# EAGLE board spion_3d (EAGLE 6.5.0)
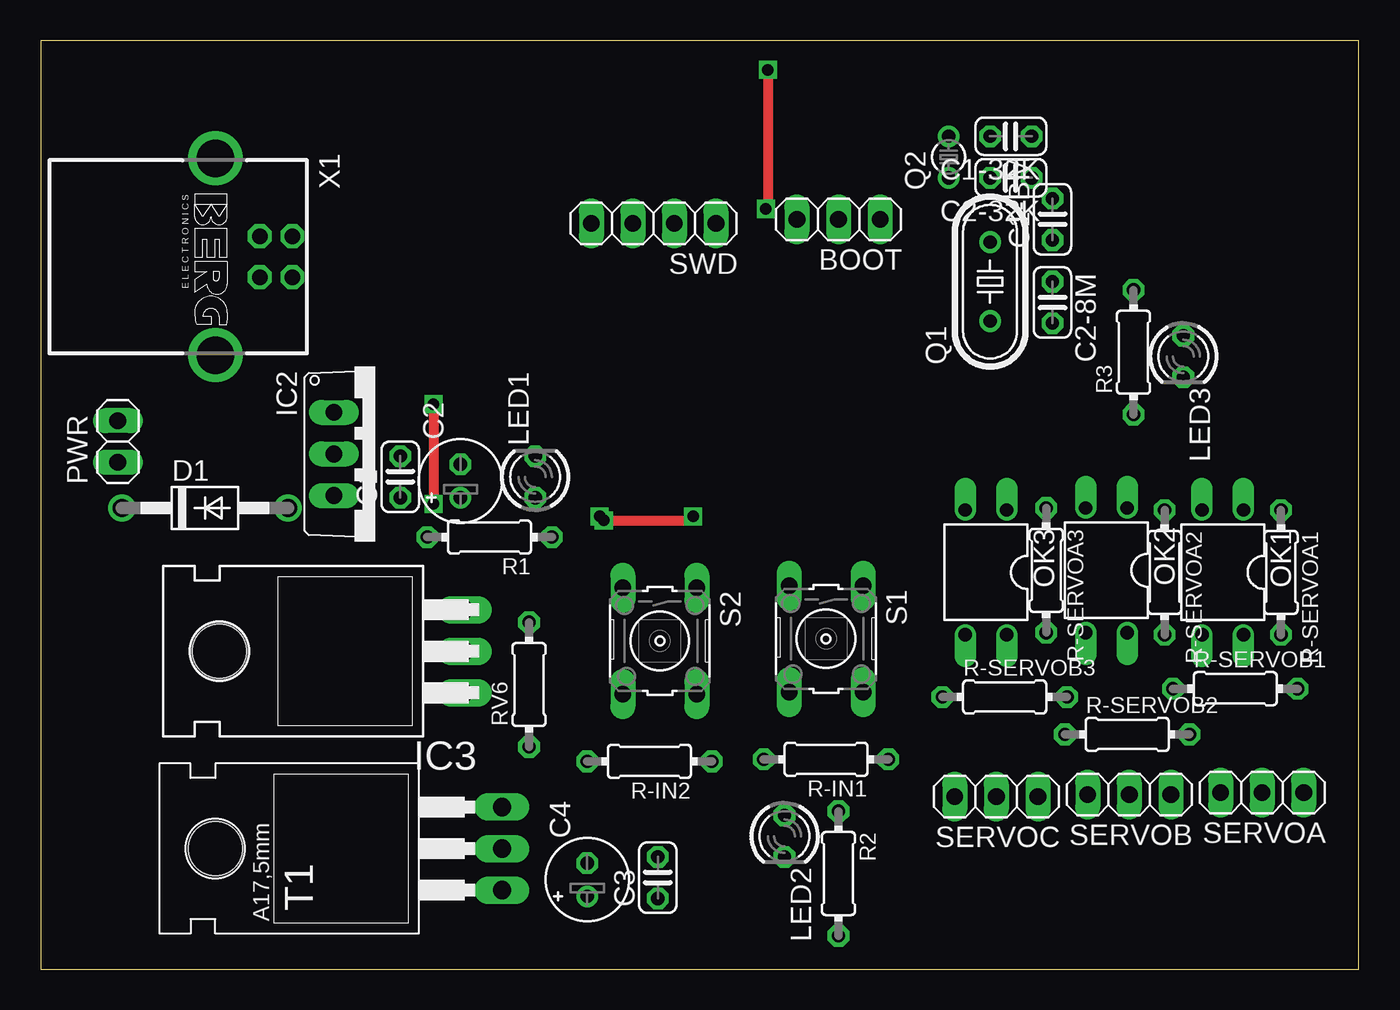
[diagram p0: board, top side]
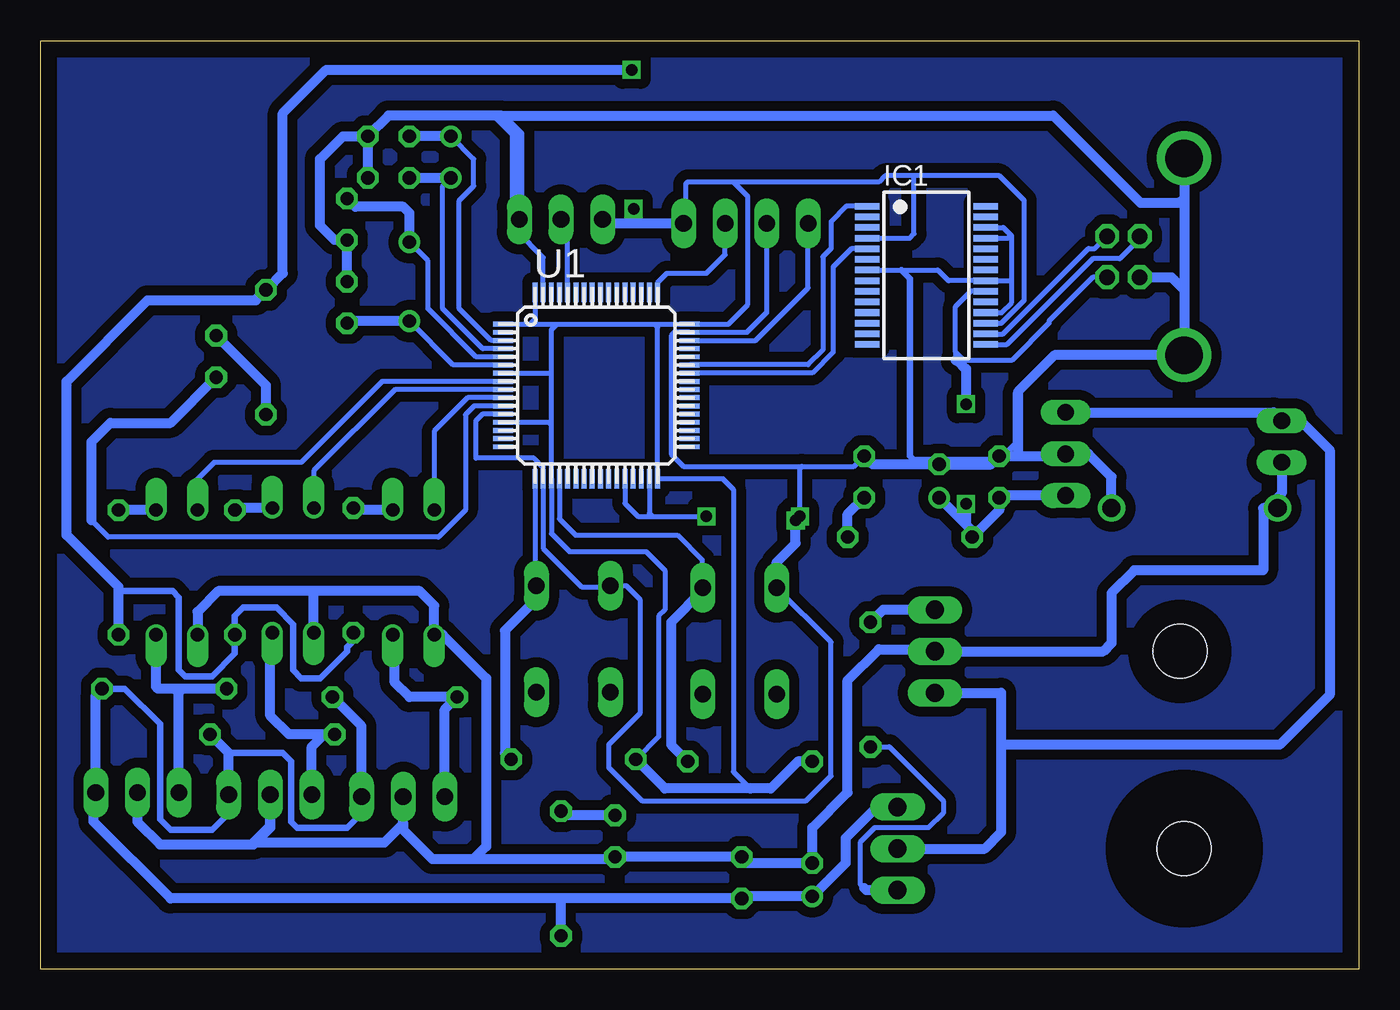
[diagram p1: board, bottom side, seen from below]

Size 80.57 x 56.76 mm. Coordinates in mm from the lower left corner, seen from the top.
Outline: 0,0 80.57,0 80.57,56.76 0,56.76 0,0
Copper layers (1*16): Top 0.035mm / dielectric 1.5mm / Bottom 0.035mm
Design rules "default": minimum track width 10mil, minimum drill 24mil, track to track 8mil, track to pad 8mil, pad to pad 8mil, via to via 8mil, smd to smd 8mil, copper to edge 40mil, drill to drill 8mil, minimum pad ring 10mil, minimum via ring 8mil, stop-mask expansion 4mil, vias tented up to drill 0mil, thermal gap 10mil

## Footprints (pad centres in the part's own frame; a part is rotated, then mirrored left to right if it is on the bottom)
1X03 = drill 1.016 long: 1 -2.54,0; 2 0,0; 3 2.54,0
C025-024X044 = drill 0.813 octagon: 1 -1.27,0; 2 1.27,0
E2-5 = drill 0.813 pad 1.27: + -1.016,0 | drill 0.813 pad 1.27 octagon: - 1.016,0
DO41-10 = drill 1.118: A 5.08,0; C -5.08,0
SSOP28 = smd 0.4 x 1.5: 1 -4.225,-3.625; 2 -3.575,-3.625; 3 -2.925,-3.625; 4 -2.275,-3.625; 5 -1.625,-3.625; 6 -0.975,-3.625; 7 -0.325,-3.625; 8 0.325,-3.625; 9 0.975,-3.625; 10 1.625,-3.625; 11 2.275,-3.625; 12 2.925,-3.625; 13 3.575,-3.625; 14 4.225,-3.625; 15 4.225,3.625; 16 3.575,3.625; 17 2.925,3.625; 18 2.275,3.625; 19 1.625,3.625; 20 0.975,3.625; 21 0.325,3.625; 22 -0.325,3.625; 23 -0.975,3.625; 24 -1.625,3.625; 25 -2.275,3.625; 26 -2.925,3.625; 27 -3.575,3.625; 28 -4.225,3.625
TO220V = drill 1.016 long: 1 -2.54,-2.54; 2 0,-2.54; 3 2.54,-2.54
TO220H = drill 1.118 long: 1 -2.54,-10.16; 2 0,-10.16; 3 2.54,-10.16 | hole 3.302: 0,4.826
LED3MM = drill 0.813 octagon: A -1.27,0; K 1.27,0
DIL04 = drill 0.813 offset: 1 -1.27,-3.81; 2 1.27,-3.81; 3 1.27,3.81; 4 -1.27,3.81
1X02 = drill 1.016 long: 1 -1.27,0; 2 1.27,0
HC49/S = drill 0.813: 1 -2.413,0; 2 2.413,0
TC26V = drill 0.813: 1 -1.27,0; 2 1.27,0
0204/7 = drill 0.813 octagon: 1 -3.81,0; 2 3.81,0
B3F-10XX = drill 1.016 long: 1 -3.251,2.261; 2 3.251,2.261; 3 -3.251,-2.261; 4 3.251,-2.261
1X04 = drill 1.016 long: 1 -3.81,0; 2 -1.27,0; 3 1.27,0; 4 3.81,0
TO220 = drill 1.118 long: 1 -2.54,-6.35; 2 0,-6.35; 3 2.54,-6.35 | hole 3.302: 0,11.176
TQFP64 = smd 1.2 x 0.3: 1 -5.7,3.75; 2 -5.7,3.25; 3 -5.7,2.75; 4 -5.7,2.25; 5 -5.7,1.75; 6 -5.7,1.25; 7 -5.7,0.75; 8 -5.7,0.25; 9 -5.7,-0.25; 10 -5.7,-0.75; 11 -5.7,-1.25; 12 -5.7,-1.75; 13 -5.7,-2.25; 14 -5.7,-2.75; 15 -5.7,-3.25; 16 -5.7,-3.75; 33 5.7,-3.75; 34 5.7,-3.25; 35 5.7,-2.75; 36 5.7,-2.25; 37 5.7,-1.75; 38 5.7,-1.25; 39 5.7,-0.75; 40 5.7,-0.25; 41 5.7,0.25; 42 5.7,0.75; 43 5.7,1.25; 44 5.7,1.75; 45 5.7,2.25; 46 5.7,2.75; 47 5.7,3.25; 48 5.7,3.75 | smd 0.3 x 1.2: 17 -3.75,-5.7; 18 -3.25,-5.7; 19 -2.75,-5.7; 20 -2.25,-5.7; 21 -1.75,-5.7; 22 -1.25,-5.7; 23 -0.75,-5.7; 24 -0.25,-5.7; 25 0.25,-5.7; 26 0.75,-5.7; 27 1.25,-5.7; 28 1.75,-5.7; 29 2.25,-5.7; 30 2.75,-5.7; 31 3.25,-5.7; 32 3.75,-5.7; 49 3.75,5.7; 50 3.25,5.7; 51 2.75,5.7; 52 2.25,5.7; 53 1.75,5.7; 54 1.25,5.7; 55 0.75,5.7; 56 0.25,5.7; 57 -0.25,5.7; 58 -0.75,5.7; 59 -1.25,5.7; 60 -1.75,5.7; 61 -2.25,5.7; 62 -2.75,5.7; 63 -3.25,5.7; 64 -3.75,5.7
PN61729-S = drill 0.95 octagon: 1 1.25,4.71; 2 -1.25,4.71; 3 -1.25,2.71; 4 1.25,2.71 | drill 2.3 pad 2.9: S1 -6.02,0; S2 6.02,0

## Placement (x,y rotation side)
BOOT  [1X03]  48.77,45.85 180 top
C1  [C025-024X044]  21.97,30.1 90 top
C1-32K  [C025-024X044]  59.31,50.93 180 top
C1-BM  [C025-024X044]  61.85,45.85 90 top
C2  [E2-5]  25.65,29.84 90 top
C2-8M  [C025-024X044]  61.85,40.77 270 top
C2-32K  [C025-024X044]  59.31,48.39 180 top
C3  [C025-024X044]  37.72,5.59 90 top
C4  [E2-5]  33.4,5.46 90 top
D1  1N4004  [DO41-10]  10.03,28.19 0 top
IC1  FT232RL  [SSOP28]  26.42,42.42 270 bottom
IC2  7805TV  [TO220V]  20.45,31.5 270 top
IC3  7806T  [TO220H]  15.75,19.43 90 top
LED1  [LED3MM]  30.23,30.1 90 top
LED2  [LED3MM]  45.47,8.13 270 top
LED3  [LED3MM]  69.85,37.47 270 top
OK1  PC817  [DIL04]  72.26,24.26 180 top
OK2  PC817  [DIL04]  65.15,24.38 180 top
OK3  PC817  [DIL04]  57.78,24.26 180 top
PWR  [1X02]  4.7,32.26 90 top
Q1  [HC49/S]  58.04,42.04 90 top
Q2  [TC26V]  55.5,49.66 90 top
R1  330  [0204/7]  27.43,26.42 180 top
R2  330  [0204/7]  48.77,5.84 270 top
R3  330  [0204/7]  66.8,37.72 90 top
R-IN1  4k7  [0204/7]  48.01,12.83 180 top
R-IN2  4k7  [0204/7]  37.21,12.7 180 top
R-SERVOA1  330  [0204/7]  75.82,24.26 270 top
R-SERVOA2  330  [0204/7]  68.71,24.26 270 top
R-SERVOA3  330  [0204/7]  61.47,24.38 270 top
R-SERVOB1  4k7  [0204/7]  73.03,17.14 0 top
R-SERVOB2  4k7  [0204/7]  66.42,14.35 0 top
R-SERVOB3  4k7  [0204/7]  58.93,16.64 0 top
RV6  1k  [0204/7]  29.84,17.4 90 top
S1  [B3F-10XX]  48.01,20.19 270 top
S2  [B3F-10XX]  37.85,20.07 270 top
SERVOA  [1X03]  74.68,10.79 180 top
SERVOB  [1X03]  66.55,10.67 180 top
SERVOC  [1X03]  58.42,10.54 180 top
SWD  [1X04]  37.47,45.59 180 top
T1  TIP31C  [TO220]  21.84,7.37 90 top
U1  STM32F10XRXT6  [TQFP64]  46.61,35.69 0 bottom
X1  PN61729-S  [PN61729-S]  10.67,43.56 270 top

## Library data of the parts
BOOT PWR SERVOA SERVOB SERVOC SWD = pinhead
C1 C1-32K C1-BM C2 C2-8M C2-32K C3 C4 R1-R3 R-IN1 R-IN2 R-SERVOA1-R-SERVOA3 R-SERVOB1-R-SERVOB3 RV6 = resistor
D1 = diode
IC1 = ftdichip; MPN: FT232RL; OC_FARNELL: 1146032; OC_NEWARK: 91K9918
IC2 IC3 = linear
LED1-LED3 = led
OK1-OK3 = optocoupler; MPN: PC817X4J000F; OC_FARNELL: 9707727; OC_NEWARK: 97K7059
Q1 = crystal; OC_FARNELL: 1667008; OC_NEWARK: unknown
Q2 = crystal; OC_FARNELL: unknown; OC_NEWARK: unknown
S1 S2 = switch-omron; MPN: B3F-1000; OC_FARNELL: 176432; OC_NEWARK: 36M3542
T1 = transistor-neu-to92
U1 = stm32
X1 = con-berg; OC_FARNELL: unknown; OC_NEWARK: unknown

## Nets
DM: IC1.16 X1.2
DP: IC1.15 X1.3
GND: C3.2 C4.- D1.C IC3.2 LED2.K OK1.3 OK2.3 OK3.3 PWR.1 SERVOA.2 SERVOB.2 SERVOC.2
IN1: R-IN1.1 S1.1 U1.17
IN2: R-IN2.1 S2.1 U1.20
N$1: SWD.2 U1.49
N$2: SWD.4 U1.46
N$3: BOOT.2 U1.60
N$4: OK1.1 R-SERVOA1.1
N$5: LED3.A R3.1
N$6: IC3.3 RV6.2
N$7: OK2.1 R-SERVOA2.1
N$8: RV6.1 T1.1
N$9: OK3.1 R-SERVOA3.1
N$14: LED1.A R1.1
N$18: LED2.A R2.1
OUT1: OK1.4 R-SERVOB1.1 SERVOA.3
OUT2: OK2.4 R-SERVOB2.1 SERVOB.3
OUT3: OK3.4 R-SERVOB3.1 SERVOC.3
P-8MA: C1-BM.2 Q1.2 U1.5
P-8MB: C2-8M.2 Q1.1 U1.6
P-32KA: C1-32K.2 Q2.2 U1.3
P-32KB: C2-32K.2 Q2.1 U1.4
RUN: LED3.K U1.11
RX: IC1.1 U1.43
SERVO1: OK1.2 U1.8
SERVO2: OK2.2 U1.9
SERVO3: OK3.2 U1.10
TX: IC1.5 U1.42
V6: C3.1 C4.+ R2.2 R-SERVOB1.2 R-SERVOB2.2 R-SERVOB3.2 SERVOA.1 SERVOB.1 SERVOC.1 T1.3
V12: IC2.1 IC3.1 PWR.2 T1.2
VCC: C1.1 C2.+ IC1.20 IC2.3 R1.2 X1.1
VDD: BOOT.3 IC1.4 IC1.17 R3.2 R-IN1.2 R-IN2.2 R-SERVOA1.2 R-SERVOA2.2 R-SERVOA3.2 SWD.1 U1.1 U1.7 U1.13 U1.19 U1.32 U1.48 U1.64
VSS: BOOT.1 C1-32K.1 C1-BM.1 C1.2 C2-8M.1 C2-32K.1 C2.- D1.A IC1.7 IC1.18 IC1.21 IC1.25 IC1.26 IC2.2 LED1.K S1.3 S2.3 SWD.3 U1.12 U1.18 U1.28 U1.31 U1.47 U1.63 X1.4 X1.S1 X1.S2

## Tracks (layer width: path | path; a pad name or v marks a point on that pad's centre or on a via)
DM
  Bottom 0.305: IC1.16 21.74,38.84 16.51,44.07 16.12,44.07 X1.2
DP
  Bottom 0.305: X1.3 13.38,44.66 14.61,43.43 16.26,43.43 21.5,38.19 IC1.15
GND
  Bottom 0.61: 63.88,23.11 57.4,23.11 56.52,22.23 OK3.3 56.01,20.45 53.34,17.78 53.34,7.49 54.1,6.73 | 63.88,23.11 69.72,23.11 70.99,21.84 OK1.3 | OK2.3 63.88,23.11 | SERVOA.2 74.68,9.02 73.28,7.62 67.56,7.62 66.55,8.64 SERVOB.2 66.55,8.76 67.56,7.75 59.56,7.75 58.42,8.89 | 58.42,8.89 SERVOC.2 | 26.42,19.56 29.34,19.56 31.24,17.65 31.24,10.79 33.4,8.64 C4.- 37.34,6.48 C3.2 LED2.K 45.59,6.73 54.1,6.73 | 26.42,19.56 26.04,19.56 IC3.2 | D1.C 5.59,28.19 | 5.59,28.19 5.84,28.19 5.84,24.38 13.72,24.38 15.11,22.99 15.11,19.94 15.62,19.43 26.29,19.43 26.42,19.56 | PWR.1 4.7,29.08 5.59,28.19 | 58.42,8.89 58.42,8.51 56.64,6.73 54.1,6.73
IN1
  Bottom 0.305: U1.17 50.36,23.54 S1.1
  Bottom 0.61: S1.1 50.27,22.63 52.2,20.7 52.2,13.21 R-IN1.1
IN2
  Bottom 0.305: U1.20 48.86,27.52 47.88,26.54 41.66,26.54 40.13,25.02 40.13,23.34 S2.1
  Bottom 0.61: S2.1 40.11,23.14 42.04,21.21 42.04,13.72 R-IN2.1
N$1
  Bottom 0.305: U1.49 42.86,41.98 42.29,42.55 39.88,42.55 38.73,43.69 SWD.2
N$2
  Bottom 0.305: U1.46 36.87,38.44 33.66,41.66 SWD.4
N$3
  Bottom 0.305: U1.60 48.36,45.44 BOOT.2
N$4
  Bottom 0.61: OK1.1 R-SERVOA1.1
N$5
  Bottom 0.61: R3.1 66.8,35.69 LED3.A
N$6
  Bottom 0.61: IC3.3 29.08,21.97 RV6.2
N$7
  Bottom 0.61: OK2.1 68.58,28.19 R-SERVOA2.1
N$8
  Bottom 0.305: RV6.1 28.7,13.59 25.4,10.29 25.4,9.53 26.29,8.64 29.59,8.64 30.48,7.75 30.48,5.21 30.23,4.95
  Bottom 0.61: T1.1 30.1,4.83 30.23,4.95
N$9
  Bottom 0.61: OK3.1 61.34,28.07 R-SERVOA3.1
N$10
  pour Bottom (isolate 0.61): 0.25,56.39 80.39,56.39 80.39,0.38 0.25,0.38
N$14
  Bottom 0.61: R1.1 31.24,27.81 LED1.A
N$18
  Bottom 0.61: LED2.A 48.51,9.4 R2.1
OUT1
  Bottom 0.61: R-SERVOB1.1 72.39,17.14 | 72.39,17.14 73.41,17.14 73.53,17.27 OK1.4 | SERVOA.3 72.14,16.89 72.39,17.14
OUT2
  Bottom 0.61: R-SERVOB2.1 63.25,14.35 | 63.25,14.35 65.41,14.35 66.55,15.49 66.55,20.45 OK2.4 | SERVOB.3 64.01,13.59 63.25,14.35
OUT3
  Bottom 0.61: OK3.4 58.93,20.32 58.93,17.53 58.04,16.64 R-SERVOB3.1 55.88,15.87 SERVOC.3
P-8MA
  Bottom 0.305: U1.5 53.95,37.44 56.9,40.39 56.9,43.31 Q1.2
  Bottom 0.61: Q1.2 58.04,46.23 58.42,46.61 61.34,46.61 C1-BM.2
P-8MB
  Bottom 0.305: U1.6 55.35,36.94 Q1.1
  Bottom 0.61: Q1.1 61.72,39.62 C2-8M.2
P-32KA
  Bottom 0.305: U1.3 53.04,38.44 54.99,40.39 54.99,46.99 54.1,47.88 54.1,49.53 Q2.2
  Bottom 0.61: Q2.2 C1-32K.2
P-32KB
  Bottom 0.305: U1.4 53.56,37.94 56.01,40.39 56.01,47.88 Q2.1
  Bottom 0.61: C2-32K.2 Q2.1
RUN
  Bottom 0.305: U1.11 54.08,34.44 54.61,33.91 54.61,28.07 56.26,26.42 76.45,26.42 77.47,27.43
  Bottom 0.61: 77.47,27.43 77.47,32.26 76.33,33.4 72.64,33.4 LED3.K
RX
  Bottom 0.305: IC1.1 31.34,46.64 32.26,45.72 32.26,44.07 32.77,43.56 32.77,37.85 33.66,36.96 40.89,36.96 U1.43
SERVO1
  Bottom 0.305: U1.8 59.69,35.94 64.64,30.99 69.98,30.99 70.99,29.97 OK1.2
SERVO2
  Bottom 0.305: U1.9 58.92,35.44 63.88,30.48 OK2.2
SERVO3
  Bottom 0.305: U1.10 54.47,34.94 56.52,32.89 OK3.2
TX
  Bottom 0.305: IC1.5 31.01,44.04 32.13,42.93 32.13,37.72 33.4,36.45 U1.42
V6
  Bottom 0.406: 69.09,13.21 65.79,13.21 65.28,12.7 65.28,9.02 64.9,8.64 61.85,8.64 60.96,9.53 SERVOC.1 | R-SERVOB1.2 75.44,17.14 73.28,14.99 73.28,9.14 72.64,8.51 70.1,8.51 69.22,9.4 69.22,10.54 SERVOB.1
  Bottom 0.61: SERVOB.1 69.09,13.21 R-SERVOB2.2 | R-SERVOB1.2 77.22,16.76 SERVOA.1 77.34,10.67 77.34,9.02 72.64,4.32 48.64,4.32 | SERVOC.1 60.96,14.86 R-SERVOB3.2 | T1.3 29.46,9.91 31.37,8 31.37,6.48 C4.+ 37.59,4.44 C3.1 48.64,4.32 | R2.2 48.77,4.19 48.64,4.32
V12
  Bottom 0.61: IC2.1 5.21,34.04 PWR.2 4.57,33.66 3.68,33.66 1.78,31.75 1.78,16.76 4.83,13.72 21.72,13.72 21.84,13.59 | IC3.1 21.84,16.89 21.84,13.59 | T1.2 22.86,7.37 21.84,8.38 21.84,13.59
VCC  (via drill 0.7)
  Top 0.61: v24,34.54 v24,28.45
  Bottom 0.305: X1.1 16.24,42.31 18.92,39.62 18.92,39.5 21.21,37.21 24.13,37.21 24.64,37.72 | 24.64,37.72 24.64,40.51 23.71,41.44 IC1.20 | 24.64,37.72 24.64,37.21
  Bottom 0.61: IC2.3 21.84,28.96 C1.1 21.97,28.07 R1.2 23.62,26.8 24,27.18 | 24,27.18 C2.+ | 24.64,37.21 24.51,37.21 24,36.7 v24,34.54 | v24,28.45 24,27.18
VDD  (via drill 0.7)
  Top 0.61: v44.45,54.99 44.45,46.61 v44.32,46.48
  Bottom 0: 61.47,20.07 61.47,19.81 62.61,18.67 | 66.17,22.1 68.33,22.1 68.71,21.72 68.71,19.3 | 72.52,23.11 75.69,23.11 75.95,23.37 75.95,23.5 78.99,26.54
  Bottom 0.305: 38.23,48.13 37.34,47.24 37.34,40.64 38.54,39.44 U1.48 43.05,39.44 | 38.23,48.13 41.02,48.13 41.15,48.01 41.15,45.72 SWD.1 | IC1.17 21.85,39.49 20.45,40.89 20.45,46.99 21.97,48.51 27.18,48.51 | 27.18,48.51 28.96,48.51 29.34,48.13 38.23,48.13 | IC1.4 27.44,44.69 27.18,44.96 27.18,48.51 | U1.1 50.67,39.44 | 50.67,39.44 49.02,39.44 | 49.02,39.44 43.05,39.44 | U1.64 50.36,39.75 50.67,39.44 | 43.05,39.44 42.86,39.24 U1.32 41.67,29.99 41.66,29.97 38.86,29.97 38.23,29.34 38.23,12.06 37.21,11.05 | 49.36,33.27 U1.19 49.36,26.63 48.26,25.53 43.56,25.53 42.42,24.38 42.42,21.97 42.8,21.59 42.8,14.22 R-IN1.2 | 49.36,33.27 49.36,36.58 | 49.36,36.58 49.36,39.1 49.02,39.44 | U1.7 49.5,36.44 49.36,36.58 | U1.13 49.52,33.44 49.36,33.27
  Bottom 0.406: R-SERVOA3.2 61.47,20.07 61.85,19.69 61.85,19.43 62.61,18.67 63.5,17.78 64.64,17.78 65.15,18.29 65.15,21.08 66.17,22.1 68.2,22.1 68.71,21.59 R-SERVOA2.2 68.71,19.3 70.1,17.91 71.75,17.91 72.14,18.29 72.14,22.73 72.52,23.11 75.56,23.11 75.82,22.86 R-SERVOA1.2
  Bottom 0.61: SWD.1 44.32,45.59 | 44.32,45.59 45.97,45.59 BOOT.3 | R-IN2.2 34.29,12.7 35.94,11.05 37.21,11.05 42.42,11.05 R-IN1.2 | R-SERVOA1.2 75.82,23.37 78.99,26.54 78.99,35.94 74.04,40.89 67.44,40.89 R3.2 65.79,42.55 65.79,52.32 63.12,54.99 v44.45,54.99 | v44.32,46.48 44.32,45.59
VSS  (via drill 0.7)
  Top 0.61: v34.42,27.43 39.62,27.43 v39.88,27.69
  Bottom 0.305: IC1.18 21.83,40.14 21.21,40.77 21.21,42.16 | 21.21,42.16 21.21,44.83 21.27,44.89 | 21.27,44.89 21.72,45.34 IC1.26 | IC1.25 21.47,44.69 21.27,44.89 | 21.21,42.16 21.28,42.09 IC1.21 25.08,42.09 25.73,42.74 27.94,42.74 IC1.7 | S2.3 32.26,19.99 32.26,11.81 33.78,10.29 43.81,10.29 45.85,12.32 45.85,13.72 43.94,15.62 43.94,22.61 44.78,23.44 S1.3 45.82,23.37 47.5,23.37 49.86,25.73 U1.18 49.86,30.68 50.42,31.24 53.97,31.24 53.97,33.53 53.57,33.94 U1.12 | 34.04,30.73 41.27,30.73 42.04,31.5 42.04,38.73 41.84,38.94 U1.47 37.39,38.94 36.2,40.13 SWD.3 | 34.04,30.73 30.86,30.73 LED1.K | U1.28 44.86,28.48 44.07,27.69 43.18,27.69 | 43.18,27.69 v39.88,27.69 | v34.16,27.69 34.16,30.61 34.04,30.73 | U1.31 43.36,27.87 43.18,27.69 | 51.44,45.09 49.86,43.51 U1.63 | 51.44,45.09 51.44,45.72 BOOT.1 | 51.44,45.09 51.56,45.21
  Bottom 0.406: 18.59,37.54 20.95,35.18 20.95,32.13 21.97,31.12 27.18,31.12 27.43,31.37 27.43,42.23 27.94,42.74
  Bottom 0.61: C1-32K.1 C2-32K.1 | C2-8M.1 C1-BM.1 62.61,44.58 63.5,45.47 63.5,49.53 62.1,50.93 C1-32K.1 | BOOT.1 51.31,51.05 52.45,52.2 | 52.45,52.2 52.7,52.2 | 52.7,52.2 59.31,52.2 C1-32K.1 | LED1.K 29.72,30.86 C2.- 22.48,30.86 C1.2 20.95,31.37 | 20.95,31.37 18.03,31.37 IC2.2 16.51,31.5 15.11,30.1 D1.A | X1.S1 10.67,47.12 | 10.67,47.12 10.67,41.53 | 10.67,41.53 X1.S2 18.59,37.54 20.83,35.31 20.83,31.5 20.95,31.37 | X1.4 11.45,42.31 10.67,41.53 | S2.3 35.59,24.87 34.42,26.04 v34.42,27.43 v34.16,27.69 | 51.56,45.21 51.56,51.05 52.7,52.2 | 52.45,52.2 18.67,52.2 13.34,46.86 10.92,46.86 10.67,47.12